# Altium PCB PCB1.PcbDoc
Units mm, origin at the board's own origin, x right, y up, seen from the top; angles counter-clockwise.
Board outline 43.05 x 22.99 mm, 2 copper layers (Top Layer, Bottom Layer); 14 components, 15 nets, 52 pads, 4 vias.
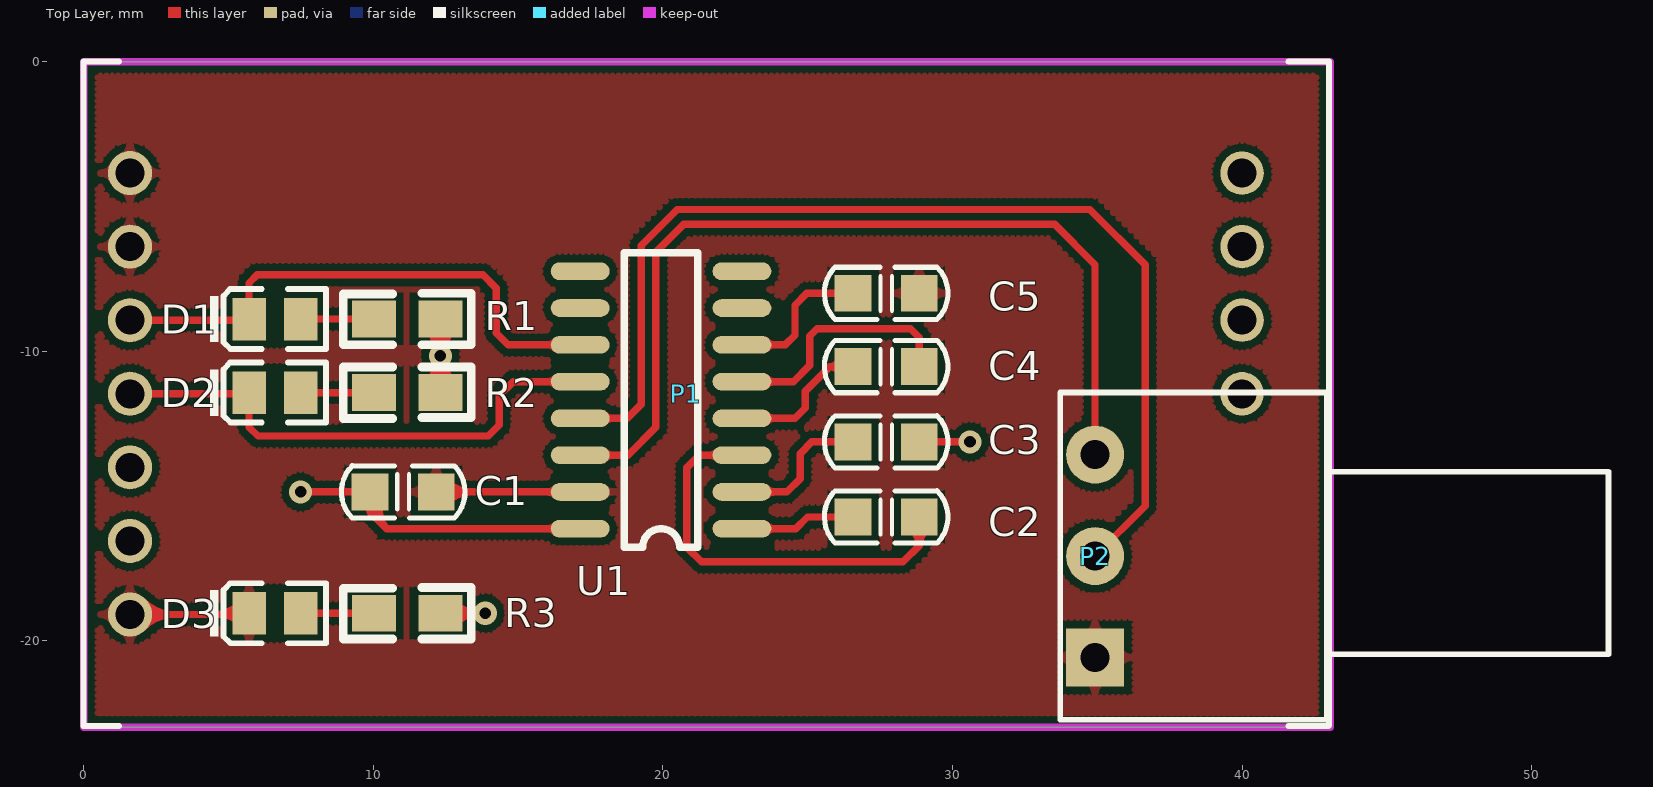
[diagram p0: Top Layer view]
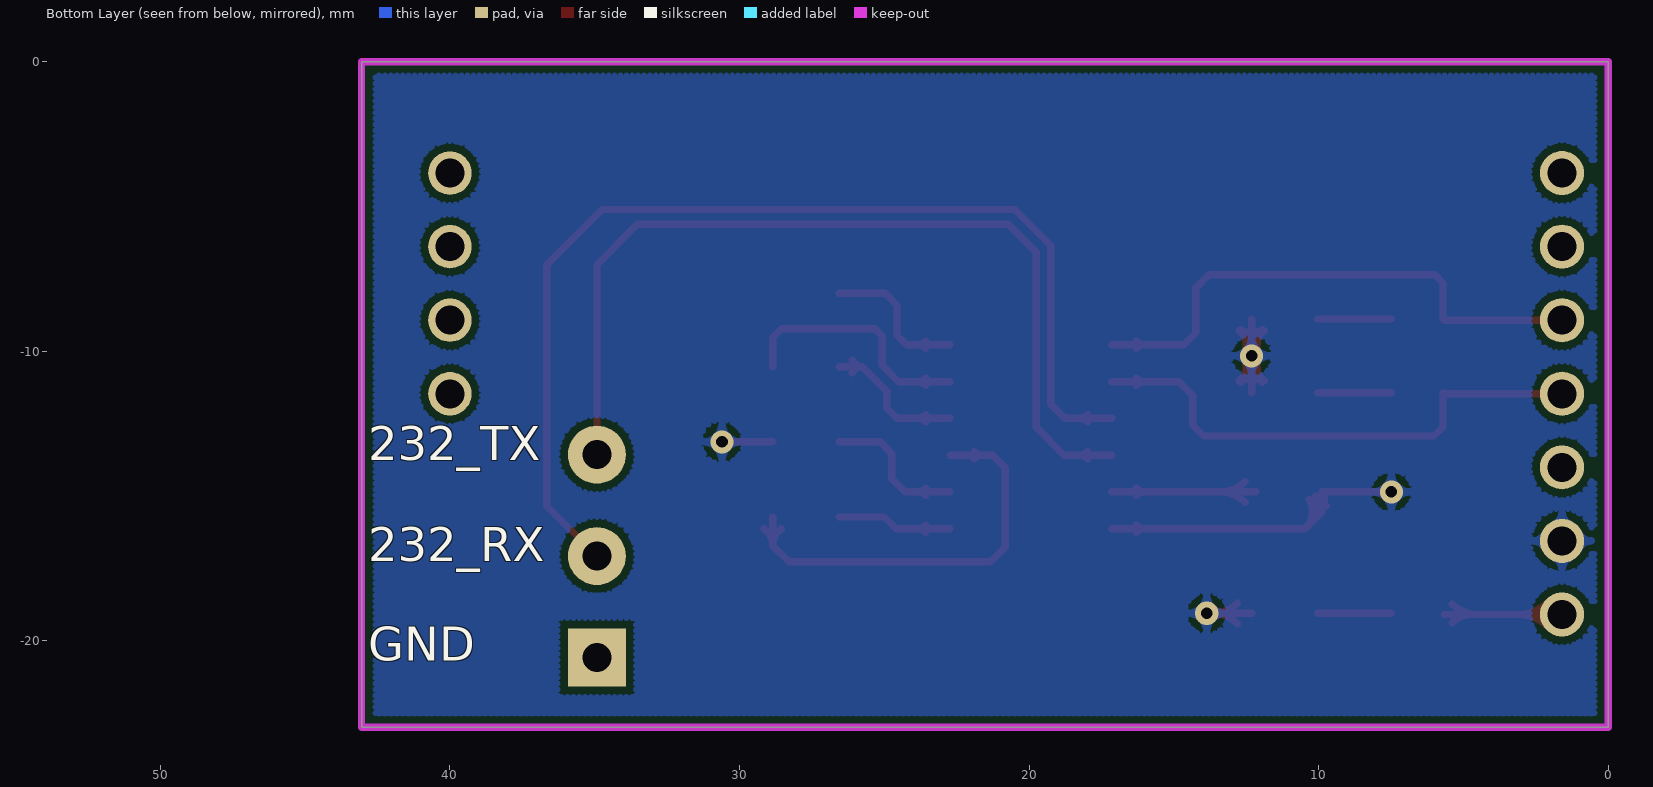
[diagram p1: Bottom Layer view, seen from below]
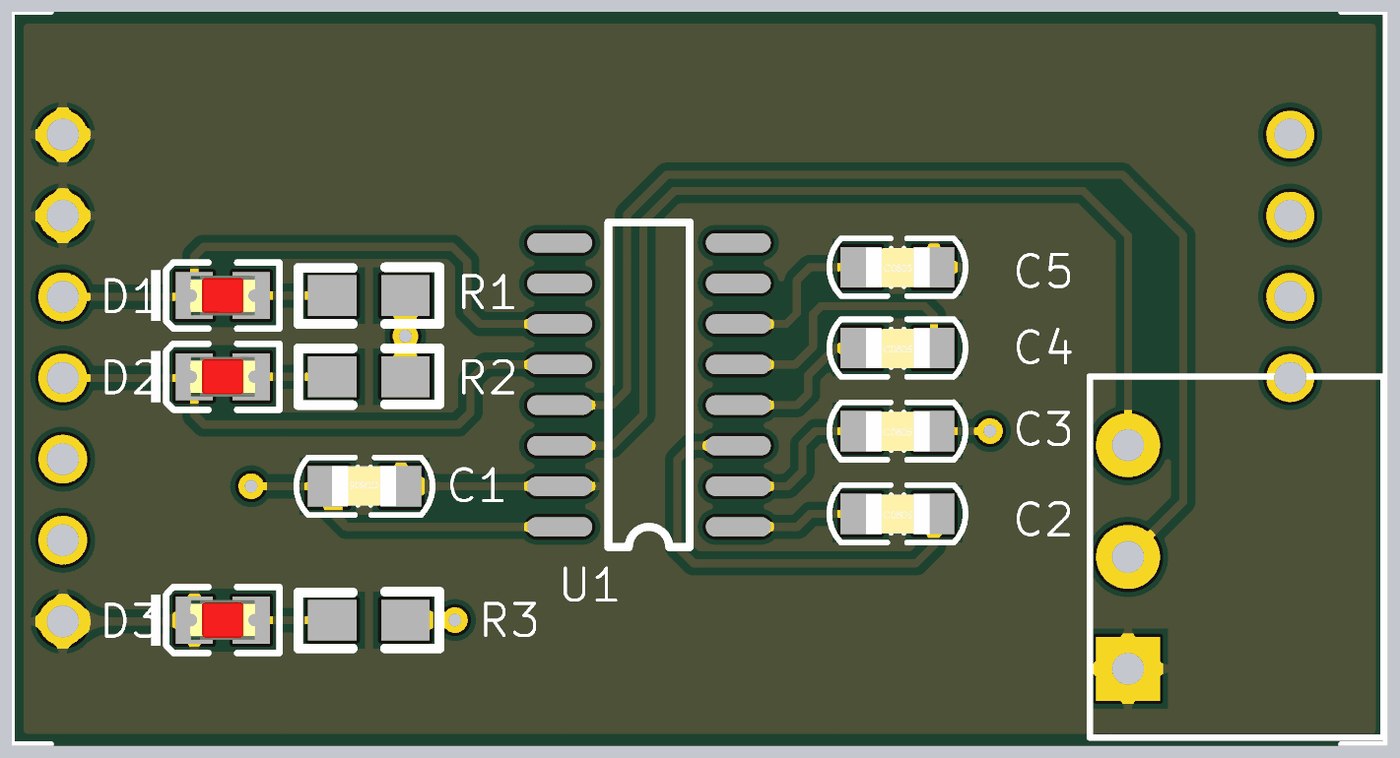
[diagram p2: 3D render of the assembled board from above, using the file's embedded part models]

## Layer stack, top to bottom
Top Layer: signal copper 0.0356
Dielectric: dielectric 0.32, FR-4, Dk 4.8
Bottom Layer: signal copper 0.0356

## Board outline
0,-22.987 0,0 43.053,0 43.053,-22.987

## Design rules (kind name [scope] priority, off if disabled: settings)
Clearance [All] p1: gap=0.254
PolygonConnect [All] p1: connectstyle=Relief reliefconductorwidth=0.254 reliefentries=4 polygonreliefangle="90 Angle"
RoutingVias [All] p1: holewidth=0.711 width=1.27 viastyle="Through Hole" minholewidth=0.711 minwidth=1.27 maxholewidth=0.711 maxwidth=1.27
SilkscreenOverComponentPads [All] p1: minsilkscreentomaskgap=0.254
SolderMaskExpansion [All] p1: expansion=0.102
Width [All] p1: maxlimit=100 minlimit=0.254 preferedwidth=0.254
27 further rules are at their usual default settings.

## Components (designator, comment, footprint, x,y, rotation, side; value= is the part's Value field where it differs from the comment)
C1 "0.1uF" C0805 11.037,-14.859 r180 top
C2 "0.1uF" C0805 27.711,-15.723 r0 top
C3 "0.1uF" C0805 27.711,-13.132 r0 top
C4 "0.1uF" C0805 27.711,-10.533 r0 top
C5 "0.1uF" C0805 27.711,-8.001 r0 top
D1 "LED0" LC-0805_LED_S1 7.493,-8.89 r0 top
D2 "LED0" LC-0805_LED_S1 7.493,-11.43 r0 top
D3 "LED0" LC-0805_LED_S1 7.493,-19.05 r0 top
P1 "Header 7" AS50-T27 1.6,-19.09 r0 top locked
P2 "MHDR1X3" DZ-3-3.5 34.925,-20.574 r90 top
R1 "1k" 0805 12.319,-8.89 r180 top
R2 "1k" 0805 10.033,-11.43 r0 top
R3 "1k" 0805 12.319,-19.05 r180 top
U1 "MAX3232CUE" SO-16 22.733,-16.129 r180 top

## Footprints (in the part's own frame and the unit in brackets; to place one, negate y for a bottom-side part, rotate by r counter-clockwise, add the part's x,y. Pads: shape width x height; smd on the part's side, far side on the other; paste and mask are expansions set on the pad)
0805 [mil]
  rect 60x50 smd: 1(0,0) 2(90,0)
  silkscreen extent -42,-35 132,35
AS50-T27 [mm]
  round 1.5 hole 1: 0(38.4,7.62) 0(38.4,10.16) 0(38.4,12.7) 0(38.4,15.24)
  round 1.524 hole 1: 1(0,0) 2(0,2.54) 3(0,5.08) 4(0,7.62) 5(0,10.16) 6(0,12.7) 7(0,15.24)
  silkscreen extent -1.6,-3.85 51.05,19.09
C0805 [mil]
  rect 50x50 smd: 1(-45,0) 2(45,0)
  silkscreen extent -84,-36 84,36, body extent -39,-25 40,24, height 20
DZ-3-3.5 [mm]
  rect 2x2 hole 1: 1(0,0)
  round 2 hole 1: 2(3.5,0) 3(7,0)
  silkscreen extent -2.15,-8 9.15,1.2
LC-0805_LED_S1 [mm]
  rect 1.16x1.47 smd: A(0.001,0) K(-1.779,0)
  silkscreen extent -3.13,-1.04 0.88,1.03, body extent -1.9,-0.62 0.12,0.62, height 1.1
SO-16 [mil]
  oval 80x24 smd: 1(0,0) 2(0,-50) 3(0,-100) 4(0,-150) 5(0,-200) 6(0,-250) 7(0,-300) 8(0,-350) 9(220,-350) 10(220,-300) 11(220,-250) 12(220,-200) 13(220,-150) 14(220,-100) 15(220,-50) 16(220,0)
  silkscreen extent 60,-375 160,25

## Part data
C1: library part C
C2 C3 C4 C5: library part Cap, "Capacitor"
D1 D2 D3: "Typical INFRARED GaAs"
P1: "Header, 7-Pin"
P2: "Header, 3-Pin"
R1 R2 R3: library part R

## Via types
v1: diameter 0.8, hole 0.4, Top Layer to Bottom Layer, 4 vias

## Nets (pads, with @x,y where several pads share a name; then routed paths per layer and width w, separated by ;. In a path a pad name is that pad's centre, name@x,y a point inside that pad or via, vN(x,y) a via of type N, cw(c..) or ccw(c..) an arc to the next point about the centre after c; other vN are vias at no path point)
GND: C1.1 C5.2 D3.K P1.1 P1.6 P1.7 P2.1 U1.15 | length 25.4
  Top Layer w0.254: P1.1 D3.K@5.674,-19.09 ; C1.1 U1.15 ; 2.52,-19.09 cw(c2.52,-18.17) 1.87,-18.821 ccw(c2.52,-18.17) 2.52,-19.09 ; 2.52,-19.09 ccw(c2.52,-20.01) 1.87,-19.359 cw(c2.52,-20.01) 2.52,-19.09 ; 3.133,-19.09 cw(c3.133,-17.557) 2.049,-18.641 ccw(c3.133,-17.557) 3.133,-19.09 ; 3.133,-19.09 ccw(c3.133,-20.623) 2.049,-19.539 cw(c3.133,-20.623) 3.133,-19.09 ; 13.407,-14.859 cw(c13.407,-13.633) 12.54,-14.5 ccw(c13.407,-13.633) 13.407,-14.859 ; 13.407,-14.859 ccw(c13.407,-16.085) 12.54,-15.218 cw(c13.407,-16.085) 13.407,-14.859 ; 16.005,-14.859 cw(c16.005,-15.288) 16.308,-14.985 ccw(c16.005,-15.288) 16.005,-14.859 ; 16.005,-14.859 ccw(c16.005,-14.43) 16.308,-14.733 cw(c16.005,-14.43) 16.005,-14.859 ; 4.524,-19.09 ccw(c4.524,-17.86) 5.394,-18.73 cw(c4.524,-17.86) 4.524,-19.09 ; 4.717,-19.09 cw(c4.717,-20.047) 5.394,-19.37 ccw(c4.717,-20.047) 4.717,-19.09
NetC2_1: C2.1 U1.1 | length 5.4
  Top Layer w0.254: U1.1 24.587,-16.129 24.994,-15.723 C2.1 ; 23.873,-16.129 cw(c23.873,-15.7) 23.57,-16.003 ccw(c23.873,-15.7) 23.873,-16.129 ; 23.873,-16.129 ccw(c23.873,-16.558) 23.57,-16.255 cw(c23.873,-16.558) 23.873,-16.129
NetC2_2: C2.2 U1.3 | length 18.3
  Top Layer w0.254: U1.3 21.26,-13.589 20.828,-14.021 20.828,-16.764 21.336,-17.272 28.296,-17.272 28.854,-16.713 C2.2 ; 21.593,-13.589 cw(c21.593,-14.018) 21.896,-13.715 ccw(c21.593,-14.018) 21.593,-13.589 ; 21.593,-13.589 ccw(c21.593,-13.16) 21.896,-13.463 cw(c21.593,-13.16) 21.593,-13.589 ; 28.854,-16.713 cw(c29.566,-16.713) 29.151,-16.135 ccw(c29.566,-16.713) 28.854,-16.713 ; 28.854,-16.713 ccw(c28.143,-16.713) 28.558,-16.135 cw(c28.143,-16.713) 28.854,-16.713
NetC3_1: C3.1 U1.2 | length 6.4
  Top Layer w0.254: U1.2 24.282,-14.859 24.74,-14.402 24.74,-13.538 25.146,-13.132 C3.1 ; 23.873,-14.859 cw(c23.873,-14.43) 23.57,-14.733 ccw(c23.873,-14.43) 23.873,-14.859 ; 23.873,-14.859 ccw(c23.873,-15.288) 23.57,-14.985 cw(c23.873,-15.288) 23.873,-14.859
NetC4_1: C4.1 U1.4 | length 8
  Top Layer w0.254: U1.4 24.562,-12.319 24.917,-11.963 24.917,-11.379 25.764,-10.533 ; C4.1 25.764,-10.533 ; 23.873,-12.319 cw(c23.873,-11.89) 23.57,-12.193 ccw(c23.873,-11.89) 23.873,-12.319 ; 23.873,-12.319 ccw(c23.873,-12.748) 23.57,-12.445 cw(c23.873,-12.748) 23.873,-12.319 ; 25.764,-10.533 cw(c25.764,-10.915) 26.11,-10.751 ccw(c25.764,-10.915) 25.764,-10.533 ; 25.764,-10.533 ccw(c25.764,-10.15) 26.11,-10.314 cw(c25.764,-10.15) 25.764,-10.533
NetC4_2: C4.2 U1.5 | length 10
  Top Layer w0.254: U1.5 24.511,-11.049 25.07,-10.49 25.07,-9.474 25.324,-9.22 28.55,-9.22 28.854,-9.525 C4.2 ; 23.873,-11.049 cw(c23.873,-10.62) 23.57,-10.923 ccw(c23.873,-10.62) 23.873,-11.049 ; 23.873,-11.049 ccw(c23.873,-11.478) 23.57,-11.175 cw(c23.873,-11.478) 23.873,-11.049
NetC5_1: C5.1 U1.6 | length 6.5
  Top Layer w0.254: U1.6 24.232,-9.779 24.562,-9.449 24.562,-8.407 24.968,-8.001 C5.1 ; 23.873,-9.779 cw(c23.873,-9.35) 23.57,-9.653 ccw(c23.873,-9.35) 23.873,-9.779 ; 23.873,-9.779 ccw(c23.873,-10.208) 23.57,-9.905 cw(c23.873,-10.208) 23.873,-9.779
NetD1_A: D1.A R1.2 | length 2.5
  Top Layer w0.254: D1.A R1.2
NetD2_A: D2.A R2.1 | length 2.5
  Top Layer w0.254: D2.A R2.1
NetD3_A: D3.A R3.2 | length 2.5
  Top Layer w0.254: D3.A R3.2
RS232_RX: P2.2 U1.13 | length 38.6
  Top Layer w0.254: U1.13 18.771,-12.319 19.253,-11.836 19.253,-6.35 20.498,-5.105 34.747,-5.105 36.652,-7.01 36.652,-15.347 P2.2 ; 18.285,-12.319 cw(c18.285,-11.89) 17.982,-12.193 ccw(c18.285,-11.89) 18.285,-12.319 ; 18.285,-12.319 ccw(c18.285,-12.748) 17.982,-12.445 cw(c18.285,-12.748) 18.285,-12.319
RS232_TX: P2.3 U1.14 | length 33.1
  Top Layer w0.254: U1.14 18.796,-13.589 19.761,-12.624 19.761,-6.579 20.726,-5.613 33.528,-5.613 34.925,-7.01 P2.3 ; 18.285,-13.589 cw(c18.285,-13.16) 17.982,-13.463 ccw(c18.285,-13.16) 18.285,-13.589 ; 18.285,-13.589 ccw(c18.285,-14.018) 17.982,-13.715 cw(c18.285,-14.018) 18.285,-13.589
TTL_RX: D2.K P1.4 U1.12 | length 19.5
  Top Layer w0.254: P1.4 D2.K@5.674,-11.47 ; D2.K 5.714,-12.623 6.02,-12.929 13.97,-12.929 14.351,-12.548 14.351,-11.532 14.834,-11.049 U1.12 ; 16.005,-11.049 cw(c16.005,-11.478) 16.308,-11.175 ccw(c16.005,-11.478) 16.005,-11.049 ; 16.005,-11.049 ccw(c16.005,-10.62) 16.308,-10.923 cw(c16.005,-10.62) 16.005,-11.049
TTL_TX: D1.K P1.5 U1.11 | length 20.1
  Top Layer w0.254: P1.5 D1.K@5.674,-8.93 ; D1.K 5.714,-7.646 5.994,-7.366 13.792,-7.366 14.249,-7.823 14.249,-9.373 14.656,-9.779 U1.11 ; 16.005,-9.779 cw(c16.005,-10.208) 16.308,-9.905 ccw(c16.005,-10.208) 16.005,-9.779 ; 16.005,-9.779 ccw(c16.005,-9.35) 16.308,-9.653 cw(c16.005,-9.35) 16.005,-9.779
VCC3.3: C1.2 C3.2 P1.2 R1.1 R2.2 R3.1 U1.16 | length 63.8
  Top Layer w0.254: v1(7.493,-14.859) C1.2 ; R2.2@11.885,-11.025 ccw(c11.466,-10.472) 12.16,-10.472 ccw(c12.771,-10.472) R2.2@12.455,-10.995 ; R1.1@11.885,-9.295 cw(c11.465,-9.848) 12.16,-9.848 cw(c12.772,-9.848) R1.1@12.455,-9.325 ; R1.1@12.034,-9.378 ccw(c12.896,-9.148) v1@12.454,-9.923 ; R2.2@12.034,-10.941 cw(c12.895,-11.172) v1@12.454,-10.397 ; v1@12.083,-10.296 cw(c11.728,-10.501) 12.124,-10.607 ; v1@12.083,-10.024 ccw(c11.728,-9.819) 12.123,-9.713 ; R2.2@12.183,-10.995 ccw(c11.867,-10.472) 12.478,-10.472 ccw(c13.172,-10.472) R2.2@12.753,-11.025 ; R1.1@12.183,-9.325 cw(c11.866,-9.848) 12.478,-9.848 cw(c13.173,-9.848) R1.1@12.753,-9.295 ; v1@12.184,-10.397 cw(c11.743,-11.172) R2.2@12.604,-10.941 ; v1@12.184,-9.923 ccw(c11.742,-9.148) R1.1@12.604,-9.378 ; R3.1 v1(13.868,-19.05) ; R2.2 R1.1 ; 12.514,-10.607 cw(c12.91,-10.501) v1@12.555,-10.296 ; 12.515,-9.713 ccw(c12.91,-9.819) v1@12.555,-10.024 ; U1.16 10.465,-16.129 9.894,-15.559 ; C3.2 v1(30.607,-13.132) ; 9.894,-15.558 cw(c10.122,-15.558) 10.051,-15.342 ccw(c10.122,-15.558) 9.894,-15.558 ; 9.894,-15.558 ccw(c9.667,-15.558) 9.737,-15.342 cw(c9.667,-15.558) 9.894,-15.558 ; 9.894,-15.559 C1.2 ; C1.2 ccw(c10.468,-15.193) 9.999,-15.663 cw(c10.468,-15.193) C1.2 ; v1@12.087,-10.304 cw(c11.552,-10.635) R2.2@12.16,-10.798 ; v1@12.087,-10.304 cw(c11.552,-10.635) R2.2@12.16,-10.798 ; v1@12.087,-10.304 cw(c11.552,-10.635) R2.2@12.16,-10.798 ; v1@12.087,-10.016 ccw(c11.552,-9.685) R1.1@12.16,-9.522 ; v1@12.087,-10.016 ccw(c11.552,-9.685) R1.1@12.16,-9.522 ; v1@12.087,-10.016 ccw(c11.552,-9.685) R1.1@12.16,-9.522 ; 12.166,-10.773 cw(c12.766,-10.934) v1@12.455,-10.396 ; 12.166,-10.773 cw(c12.766,-10.934) v1@12.455,-10.396 ; 12.166,-10.773 cw(c12.766,-10.934) v1@12.455,-10.396 ; 12.166,-9.547 ccw(c12.766,-9.386) v1@12.455,-9.924 ; 12.166,-9.547 ccw(c12.766,-9.386) v1@12.455,-9.924 ; 12.166,-9.547 ccw(c12.766,-9.386) v1@12.455,-9.924 ; v1@12.183,-10.396 cw(c11.872,-10.934) 12.472,-10.773 ; v1@12.183,-10.396 cw(c11.872,-10.934) 12.472,-10.773 ; v1@12.183,-10.396 cw(c11.872,-10.934) 12.472,-10.773 ; v1@12.183,-9.924 ccw(c11.872,-9.386) 12.472,-9.547 ; v1@12.183,-9.924 ccw(c11.872,-9.386) 12.472,-9.547 ; v1@12.183,-9.924 ccw(c11.872,-9.386) 12.472,-9.547 ; R2.2@12.319,-10.819 cw(c12.978,-10.819) 12.512,-10.353 ccw(c12.978,-10.819) R2.2@12.319,-10.819 ; R2.2@12.319,-10.819 ccw(c11.66,-10.819) 12.126,-10.353 cw(c11.66,-10.819) R2.2@12.319,-10.819 ; v1@12.319,-10.204 cw(c11.093,-10.204) 11.96,-11.071 ccw(c11.093,-10.204) v1@12.319,-10.204 ; v1@12.319,-10.204 ccw(c13.545,-10.204) 12.678,-11.071 cw(c13.545,-10.204) v1@12.319,-10.204 ; v1@12.319,-10.116 cw(c13.545,-10.116) 12.678,-9.249 ccw(c13.545,-10.116) v1@12.319,-10.116 ; v1@12.319,-10.116 ccw(c11.093,-10.116) 11.96,-9.249 cw(c11.093,-10.116) v1@12.319,-10.116 ; R1.1@12.319,-9.501 cw(c11.66,-9.501) 12.126,-9.967 ccw(c11.66,-9.501) R1.1@12.319,-9.501 ; R1.1@12.319,-9.501 ccw(c12.978,-9.501) 12.512,-9.967 cw(c12.978,-9.501) R1.1@12.319,-9.501 ; R2.2@12.478,-10.798 cw(c13.086,-10.635) v1@12.551,-10.304 ; R2.2@12.478,-10.798 cw(c13.086,-10.635) v1@12.551,-10.304 ; R2.2@12.478,-10.798 cw(c13.086,-10.635) v1@12.551,-10.304 ; R1.1@12.478,-9.522 ccw(c13.086,-9.685) v1@12.551,-10.016 ; R1.1@12.478,-9.522 ccw(c13.086,-9.685) v1@12.551,-10.016 ; R1.1@12.478,-9.522 ccw(c13.086,-9.685) v1@12.551,-10.016 ; 13.209,-19.05 cw(c13.209,-19.709) 13.675,-19.243 ccw(c13.209,-19.709) 13.209,-19.05 ; 13.209,-19.05 ccw(c13.209,-18.391) 13.675,-18.857 cw(c13.209,-18.391) 13.209,-19.05 ; v1@13.672,-19.05 cw(c13.672,-17.824) 12.805,-18.691 ccw(c13.672,-17.824) v1@13.672,-19.05 ; v1@13.672,-19.05 ccw(c13.672,-20.276) 12.805,-19.409 cw(c13.672,-20.276) v1@13.672,-19.05 ; 16.005,-16.129 cw(c16.005,-16.558) 16.308,-16.255 ccw(c16.005,-16.558) 16.005,-16.129 ; 16.005,-16.129 ccw(c16.005,-15.7) 16.308,-16.003 cw(c16.005,-15.7) 16.005,-16.129 ; C1.2@10.114,-14.987 ccw(c10.763,-15.365) 10.232,-15.896 cw(c10.763,-15.365) C1.2@10.114,-14.987 ; C1.2@10.333,-15.115 ccw(c11.057,-15.536) 10.465,-16.129 cw(c11.057,-15.536) C1.2@10.333,-15.115
  other v1: 12.319,-10.16
pads on no net: P1.0 P1.3 U1.7 U1.8 U1.9 U1.10

## Polygon pours and split planes (outlines as drawn)
VCC3.3 on Bottom Layer "Bottom Layer-No Net" (hatched 90Degree grid 0.203 track 0.203, remove dead copper, pour order 3): 0,0 43.053,0 43.053,-22.987 0,-22.987 0,0
GND on Top Layer "Bottom Layer-No Net" (hatched 90Degree grid 0.203 track 0.203, remove dead copper): 0,0 43.053,0 43.053,-22.987 0,-22.987 0,0

## Keep-outs
Keep-Out Layer:
  the board outline again, w0.254

## Silkscreen, mask and mechanical layers (free items; w line width, h text height)
Bottom Overlay:
  text "232_TX" at 42.824,-14.162 h2
  text "232_RX" at 42.824,-17.653 h2
  text "GND" at 42.824,-21.082 h2